# EAGLE board combo_10_01_2017 (EAGLE 6.6.0)
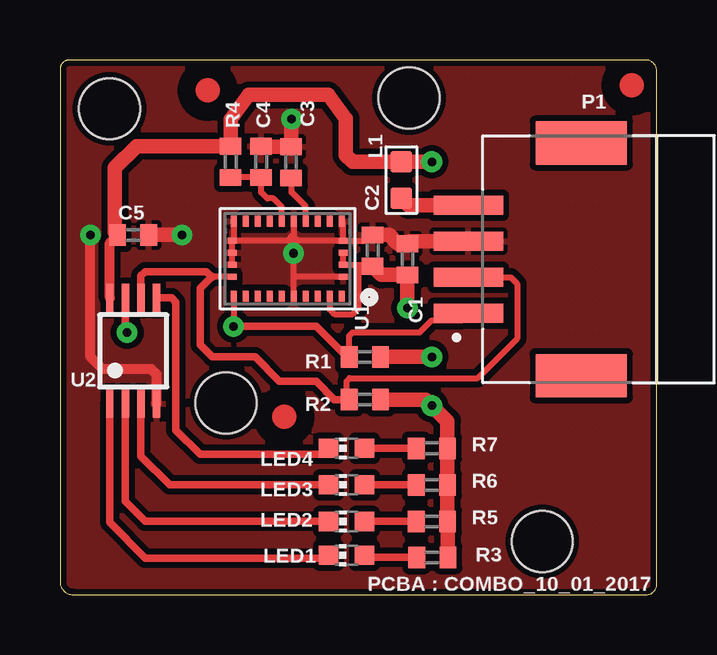
[diagram p0: board, top side]
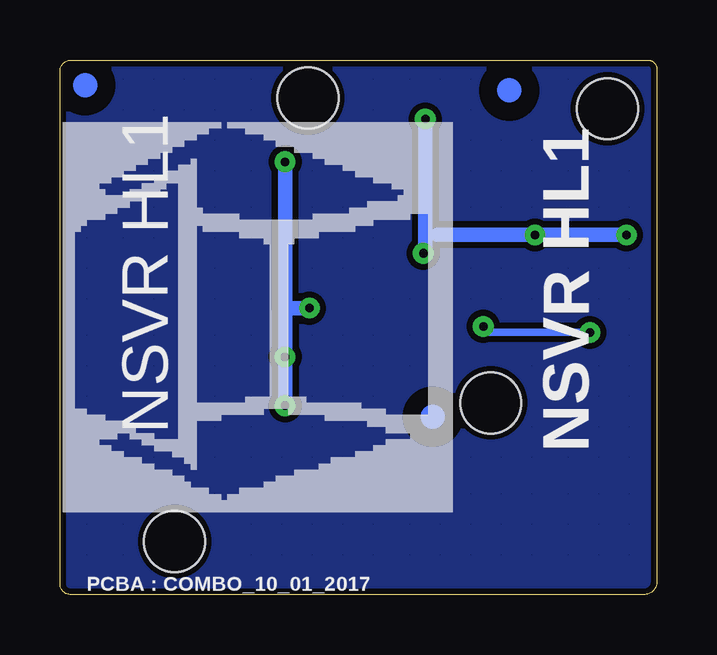
[diagram p1: board, bottom side, seen from below]

Size 24.87 x 22.28 mm. Coordinates in mm from the lower left corner, seen from the top.
Outline: 0,21.88 0,0.54 arc90 0.54,0 24.43,0 arc90 24.87,0.44 24.87,21.8 arc90 24.4,22.28 0.4,22.28 arc90 0,21.88
Copper layers (1*16): Top 0.035mm / dielectric 1.5mm / Bottom 0.035mm
Design rules "PatternAgents_7mil": minimum track width 7mil, minimum drill 14mil, track to track 7mil, track to pad 7mil, pad to pad 7mil, via to via 7mil, smd to smd 7mil, copper to edge 7mil, drill to drill 7mil, minimum pad ring 12mil, minimum via ring 10mil, stop-mask expansion 4mil, vias tented up to drill 25mil, thermal gap 7mil
Holes 2.54 mm at 14.54,20.69 6.92,7.99 20.1,2.21 2.06,20.25

## Footprints (pad centres in the part's own frame; a part is rotated, then mirrored left to right if it is on the bottom)
C0402 = smd 0.7 x 0.9: 1 -0.65,0; 2 0.65,0
L0603 = smd 0.889 x 0.889: 1 -0.762,0; 2 0.762,0
CHIP-LED0603 = smd 0.8 x 0.8: A 0,-0.75; C 0,0.75
MOLEX_502585-0470 = smd 0.8 x 2.9: 1 -2.25,0; 2 -0.75,0; 3 0.75,0; 4 2.25,0 | smd 1.8 x 3.8: P1 -4.85,-4.7; P2 4.85,-4.7
R0402 = smd 0.7 x 0.9: 1 -0.65,0; 2 0.65,0
BNO055 = smd 0.25 x 0.475: 1 -2.25,1.562; 6 -2.25,-1.562; 7 -1.75,-1.562; 8 -1.25,-1.562; 9 -0.75,-1.562; 10 -0.25,-1.562; 11 0.25,-1.562; 12 0.75,-1.562; 13 1.25,-1.562; 14 1.75,-1.562; 15 2.25,-1.562; 20 2.25,1.562; 21 1.75,1.562; 22 1.25,1.562; 23 0.75,1.562; 24 0.25,1.562; 25 -0.25,1.562; 26 -0.75,1.562; 27 -1.25,1.562; 28 -1.75,1.562 | smd 0.375 x 0.25: 2 -2.312,0.75; 3 -2.312,0.25; 4 -2.312,-0.25; 5 -2.312,-0.75; 16 2.312,-0.75; 17 2.312,-0.25; 18 2.312,0.25; 19 2.312,0.75
TSSOP8 = smd 1.2 x 0.305: 1 -2.2,0.975; 2 -2.2,0.325; 3 -2.2,-0.325; 4 -2.2,-0.975; 5 2.2,-0.975; 6 2.2,-0.325; 7 2.2,0.325; 8 2.2,0.975

## Placement (x,y rotation side)
$$U$2  [CIRCLE-1MM-2R]  9.34,7.41 90 top
C1  10uF  [C0402]  14.48,13.97 90 top
C2  0.1u  [C0402]  13.03,14.34 90 top
C3  0.1u  [C0402]  9.63,18.01 90 top
C4  0.1u  [C0402]  8.38,18.03 90 top
C5  10uF  [C0402]  3.05,14.99 0 top
L1  120OHM-500MA  [L0603]  14.22,17.27 270 top
LED1  [CHIP-LED0603]  11.94,1.64 90 top
LED2  [CHIP-LED0603]  11.94,3.05 90 top
LED3  [CHIP-LED0603]  11.94,4.57 90 top
LED4  [CHIP-LED0603]  11.94,6.1 90 top
P1  502585-0470  [MOLEX_502585-0470]  17.02,13.97 90 top
R1  4.7k  [R0402]  12.7,9.91 180 top
R2  4.7k  [R0402]  12.7,8.13 180 top
R3  100  [R0402]  15.52,1.55 180 top
R4  4.7k  [R0402]  7.11,18.03 270 top
R5  100  [R0402]  15.49,3.05 180 top
R6  100  [R0402]  15.49,4.57 180 top
R7  100  [R0402]  15.49,6.1 180 top
U1  BNO055  [BNO055]  9.48,13.99 180 top
U2  PCA9533DP  [TSSOP8]  3.05,10.16 90 top
U$1  [CIRCLE-1MM-2R]  23.83,21.23 90 top
U$3  [CIRCLE-1MM-2R]  6.15,21.01 90 top
U$5  [NSVR_LOGO]  24.64,3.56 0 bottom

## Library data of the parts
$$U$2 U$1 U$3 = fiducial
C1-C5 R1-R7 = rcl
L1 = halcyonmod_Passives; MPN: BLM18AG121SN1D
LED1-LED4 = led
P1 = 502585-0470; AVAILABILITY: Good; DESCRIPTION: 1.50mm Pitch CLIK-Mate™ Wire-to-Board PCB Receptacle, Single Row, Right Angle, 4 Circuits; MF: Molex; MP: 502585-0470; PACKAGE: None; PRICE: 0.44 USD
U1 = microbuilder
U2 = PatternAgents-NXP
U$5 = nsvr

## Nets
3V3_EXT: L1.2 P1.4
!RST: C4.1 R4.2 U1.11
CAP: C3.1 U1.9
GND: C1.2 C2.2 C3.2 C4.2 C5.2 P1.3 U1.2 U1.5 U1.6 U1.10 U1.15 U1.16 U1.17 U1.18 U1.25 U2.4
LED1: LED1.C U2.1
LED2: LED2.C U2.2
LED3: LED3.C U2.3
LED4: LED4.C U2.5
N$2: LED1.A R3.2
N$9: LED2.A R5.2
N$10: LED3.A R6.2
N$11: LED4.A R7.2
SCL: P1.2 R2.2 U1.19 U2.6
SDA: P1.1 R1.2 U1.20 U2.7
VDD: C1.1 C2.1 C5.1 L1.1 R1.1 R2.1 R3.1 R4.1 R5.1 R6.1 R7.1 U1.3 U1.4 U1.28 U2.8

## Tracks (layer width: path | path; a pad name or v marks a point on that pad's centre or on a via)
3V3_EXT
  Top 0.61: P1.4 14.51,16.22 L1.2
!RST
  Top 0.254: U1.11 9.23,16.17 8.89,16.51 8.64,16.51 8.38,16.76 C4.1 R4.2
CAP
  Top 0.254: U1.9 10.23,16.18 9.65,16.76 9.65,17.33 C3.1
GND  (via drill 0.36)
  Top 0.178: 9.65,14.99 9.55,14.86 | 8.89,18.8 8.89,18.66 | 9.14,18.54 9.14,18.66 8.89,18.8 | 8.89,18.8 8.87,18.73 | C4.2 8.38,18.54 8.43,18.64
  Top 0.254: U1.5 12.79,14.74 C2.2 | U1.5 11.79,15.49 U1.6 | U1.5 9.91,14.74 | 9.91,14.74 9.65,14.74 | 9.65,14.74 U1.16 | U1.25 9.73,13.21 | 9.73,13.21 v9.73,14.22 9.73,14.66 9.65,14.74 | U1.10 9.73,14.92 9.91,14.74 | U1.2 9.77,13.24 9.73,13.21 | U1.18 U1.17 U1.16 | U1.15 7.23,14.81 U1.16
  Top 0.406: U2.4 4.02,9.19 3.81,9.4 1.78,9.4 1.27,9.91 v1.27,14.99
  Top 0.61: P1.3 14.58,14.72 C1.2 14.08,14.62 13.72,14.99 C2.2 | C4.2 8.4,18.66 8.89,18.66 9.14,18.66 C3.2 9.62,19.79 v9.65,19.81 | C5.2 v5.08,14.99
  Bottom 0.61: v9.65,19.81 9.65,14.3 v9.73,14.22 | 9.16,14.99 v5.08,14.99 v1.27,14.99
  pour Top (isolate 0.254, hatched): 0,0 0,22.35 24.89,22.35 24.89,0
LED1
  Top 0.305: U2.1 2.07,3.01 3.56,1.52 11.07,1.52 LED1.C
LED2
  Top 0.305: U2.2 2.72,3.88 3.56,3.05 LED2.C
LED3
  Top 0.305: U2.3 3.37,5.77 4.57,4.57 LED3.C
LED4
  Top 0.305: U2.5 4.66,12.36 4.83,12.19 4.83,6.86 5.84,5.84 10.93,5.84 LED4.C
N$1
  pour Bottom (isolate 0.254, hatched): 0,0 0,22.35 24.89,22.35 24.89,0
N$2
  Top 0.305: R3.2 12.78,1.55 LED1.A
N$9
  Top 0.305: R5.2 LED2.A
N$10
  Top 0.305: R6.2 LED3.A
N$11
  Top 0.305: R7.2 LED4.A
SCL
  Top 0.254: U1.19 6.38,13.24 | P1.2 18.78,13.22 19.05,12.95 19.05,10.67 17.4,9.02 12.06,9.02 11.94,8.89 11.94,8.24
  Top 0.305: 6.38,13.24 6.32,13.24 | 6.32,13.24 6.1,13.46 3.56,13.46 3.37,13.28 U2.6 | 6.32,13.24 5.84,12.77 5.84,10.41 6.35,9.91 8.13,9.91 9.14,8.89 10.67,8.89 11.43,8.13 R2.2 11.94,8.24
SDA  (via drill 0.36)
  Top 0.254: U1.20 v7.23,11.18 | R1.2 12.05,10.78 12.19,10.92 14.99,10.92 15.49,11.43 16.73,11.43 P1.1
  Top 0.305: U2.7 2.72,10.99 v2.79,10.92 | R1.2 11.94,9.91 10.67,11.18 v7.23,11.18
  Bottom 0.305: v2.79,10.92 6.98,10.92 v7.23,11.18
VDD  (via drill 0.36)
  Top 0.254: 12.45,13.74 U1.3 U1.4 | 12.45,13.74 12.97,13.74 C2.1 | U1.28 11.23,11.88 11.43,11.68 12.19,11.68 12.45,11.94 12.45,13.74
  Top 0.406: U2.8 2.07,14.66 C5.1
  Top 0.61: v14.48,11.94 C1.1 13.4,13.32 C2.1 | v15.49,18.03 L1.1 12.19,18.03 11.91,18.31 11.91,19.84 11.18,20.83 7.87,20.83 7.11,19.81 R4.1 3.19,18.68 2.29,17.78 2.29,15.1 C5.1 | R3.1 16.17,3.03 R5.1 R6.1 R7.1 16.14,7.22 v15.49,7.87 15.24,8.13 R2.1 | R1.1 v15.49,9.91
  Bottom 0.61: 15.49,11.94 v15.49,18.03 | v14.48,11.94 15.49,11.94 | 15.49,11.94 v15.49,9.91 v15.49,7.87

## Text on the board
tPlace: PCBA : COMBO_10_01_2017
bPlace: PCBA : COMBO_10_01_2017
bNames: NSVR HL1 | NSVR HL1